# EAGLE board piezo-preamp-tickler_V2-RevC (EAGLE 8.2.1)
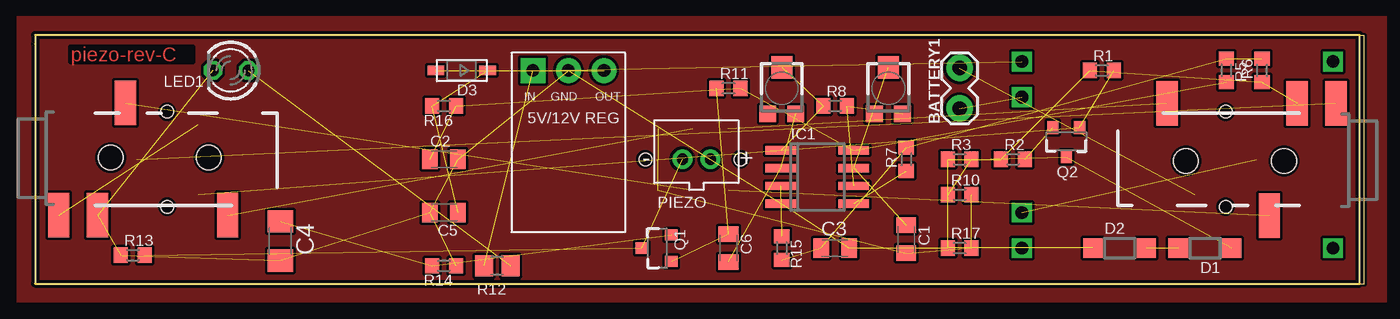
[diagram p0: board, top side]
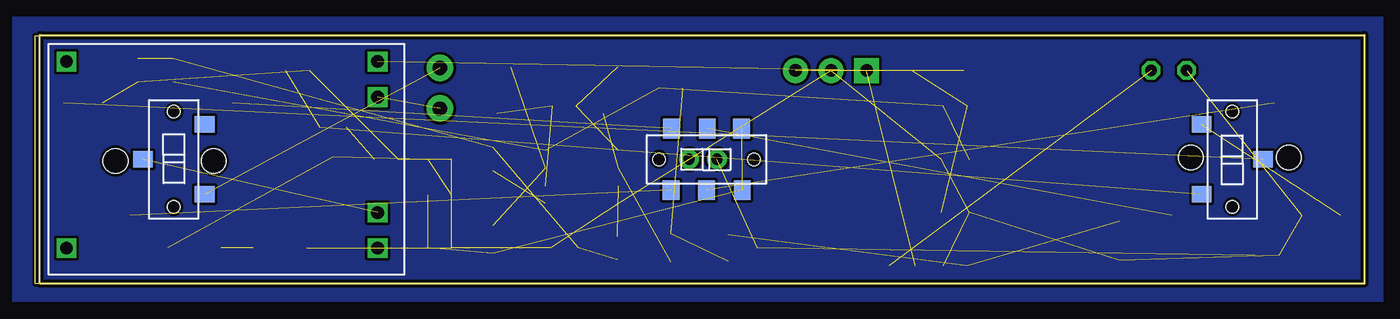
[diagram p1: board, bottom side, seen from below]

Size 94.96 x 17.78 mm. Coordinates in mm from the lower left corner, seen from the top.
Outline: 94.61,0 94.96,0 94.96,17.72 0,17.72 0,17.14
Outline: 0,17.14 0,0 94.61,0
Outline: 94.61,0 94.61,17.78 0,17.78 0,17.14
Copper layers (1*16): Top 0.035mm / dielectric 1.5mm / Bottom 0.035mm
Design rules "default *": minimum track width 6mil, minimum drill 0.35mm, track to track 6mil, track to pad 6mil, pad to pad 6mil, via to via 6mil, smd to smd 6mil, copper to edge 8mil, drill to drill 6mil, minimum pad ring 10mil, minimum via ring 8mil, stop-mask expansion 4mil, vias tented up to drill 0mil, thermal gap 10mil
Net classes: 0 default: width 0.152 mm, clearance 0.2 mm

## Footprints (pad centres in the part's own frame; a part is rotated, then mirrored left to right if it is on the bottom)
1X02_LOCK = drill 1.016 pad 1.88: 1 -0.178,0; 2 2.718,0
C0805K = smd 1.1 x 1.4: 1 -1,0; 2 1,0
C3216 = smd 1.6 x 1.8: 1 -1.4,0; 2 1.4,0
SOD123 = smd 1.4 x 1.4: A 1.9,0; C -1.9,0
SOD-123 = smd 1.2 x 0.7: A 1.85,0; C -1.85,0
SO08 = smd 0.6 x 2.2: 1 -1.905,-2.6; 2 -0.635,-2.6; 3 0.635,-2.6; 4 1.905,-2.6; 5 1.905,2.6; 6 0.635,2.6; 7 -0.635,2.6; 8 -1.905,2.6
POLOLU_5V-12V_STEPUP_U3V12F5-U3V12F12 = drill 0.9 pad 1.778: GND 0,-6.35; VOUT -2.54,-6.35 | drill 0.9 pad 1.778 square: VIN 2.54,-6.35
LED3MM = drill 0.813 octagon: A -1.27,0; K 1.27,0
JST-PH-2-THM = drill 0.8 pad 1.422: 1 1,0; 2 -1,0
SWITCH_SPDT_CL-SB-12B = smd 1.2 x 1.4: P$1 -2.5,-2.2; P$2 0,2.2; P$3 2.5,-2.2 | hole 0.9: -3.4,0; 3.4,0
SOT23-3 = smd 0.8 x 0.9: 1 -0.95,-1; 2 0.95,-1; 3 0,1.1
R0603 = smd 1 x 1.1: 1 -0.85,0; 2 0.85,0
TC33X = smd 1.2 x 1.2: 1 -1,-1.825; 3 1,-1.825 | smd 1.5 x 1.6: 2 0,1.5
R0805 = smd 1.3 x 1.5: 1 -0.95,0; 2 0.95,0
AUDIO-JACK-TRRS-SMD = smd 1.524 x 3.175: EARTH -2.114,-5.271; RING1 2.644,2.759; RING2 0.66,-5.271; TIP 9.948,-5.271 | hole 1.778: 1.6,-1.15; 8.6,-1.15
SWITCH_DPDT_CL-SB-12B = smd 1.2 x 1.4: P$1 -2.5,-2.2; P$2 -0.04,-2.2; P$3 2.5,-2.2; P$4 2.54,2.2; P$5 0,2.2; P$6 -2.54,2.2 | hole 0.9: -3.4,0; 3.4,0
TP4056-LITHIUM-PROTECTED-MODULE = drill 0.9 square: B+ 10.795,4.445; B- 10.795,-3.81; IN+ -11.43,6.985; IN- -11.43,-6.35; OUT+ 10.795,6.985; OUT- 10.795,-6.35

## Placement (x,y rotation side)
BATTERY1  [1X02_LOCK]  66.04,12.7 90 top
C1  10uF  [C0805K]  62.23,3.17 270 top
C2  0.1uF  [C0805K]  29.21,8.89 0 top
C3  10uF  [C0805K]  57.15,2.54 0 top
C4  150uF  [C3216]  17.53,3.05 270 top
C5  10uF  [C0805K]  29.21,5.08 180 top
C6  3.3uF  [C0805K]  49.53,2.54 270 top
D1  [SOD123]  83.57,2.54 180 top
D2  [SOD123]  77.47,2.54 0 top
D3  1N4148  [SOD-123]  30.48,15.24 180 top
IC1  OPA2134UA  [SO08]  55.88,7.62 270 top
J_REG_12V  POLOLU_VOLTAGE_REGULATORS_3PIN  [POLOLU_5V-12V_STEPUP_U3V12F5-U3V12F12]  38.1,8.89 180 top
LED1  [LED3MM]  13.97,15.24 180 top
PIEZO  [JST-PH-2-THM]  47.24,8.89 0 top
POWER  SPDT  [SWITCH_SPDT_CL-SB-12B]  85.04,8.89 90 bottom
Q1  J201SOT-23  [SOT23-3]  44.45,2.54 90 top
Q2  J201SOT-23  [SOT23-3]  73.66,10.16 180 top
R1  2.2K  [R0603]  76.2,15.24 0 top
R2  1.2K  [R0603]  69.85,8.89 0 top
R3  1M  [R0603]  66.04,8.89 0 top
R4  20K  [TC33X]  53.34,13.97 0 top
R5  100K  [R0603]  85.09,15.24 270 top
R6  150K  [R0603]  87.63,15.24 90 top
R7  1K  [R0603]  62.23,8.89 90 top
R8  1K  [R0603]  57.15,12.7 0 top
R9  20K  [TC33X]  60.96,13.97 0 top
R10  1K  [R0603]  66.04,6.35 0 top
R11  10K  [R0603]  49.53,13.97 0 top
R12  390  [R0805]  33.02,1.27 180 top
R13  10M  [R0603]  6.99,2.03 0 top
R14  1.2K  [R0603]  29.21,1.27 180 top
R15  1K  [R0603]  53.34,2.54 270 top
R16  10  [R0603]  29.21,12.7 180 top
R17  10K  [R0603]  66.04,2.54 0 top
SW2-SPST  INPUT-select  [SWITCH_SPDT_CL-SB-12B]  9.45,8.89 270 bottom
TO-HEADSET  AUDIO-JACK3LGPADS  [AUDIO-JACK-TRRS-SMD]  3.81,10.16 0 top
TO-PHONE  AUDIO-JACK3LGPADS  [AUDIO-JACK-TRRS-SMD]  90.81,7.62 180 top
U$2  SWITCH_DPDT  [SWITCH_DPDT_CL-SB-12B]  46.99,8.89 180 bottom
USB-LIPO-CHARGER  TP4056-MODULE  [TP4056-LITHIUM-PROTECTED-MODULE]  81.28,8.89 0 bottom

## Library data of the parts
BATTERY1 = SparkFun-Connectors
C1-C6 PIEZO R4 R9 = adafruit
D1 D2 = diode
D3 = adafruit; DIGIKEY: 1N4148WTPMSCT-ND
IC1 = linear
J_REG_12V POWER Q1 Q2 R1-R3 R5-R8 R10-R17 SW2-SPST U$2 USB-LIPO-CHARGER = CMU-ArtFab
LED1 = led
TO-HEADSET TO-PHONE = Daniel

## Nets
+12V: D3.A J_REG_12V.VOUT
GND: C2.2 C3.2 C4.2 C5.2 D2.C IC1.4 J_REG_12V.GND LED1.K PIEZO.1 R1.1 R2.1 R3.1 R6.1 R13.1 R14.1 R17.1 TO-HEADSET.RING2 TO-PHONE.RING2 USB-LIPO-CHARGER.OUT-
IN+: USB-LIPO-CHARGER.IN+
IN-: USB-LIPO-CHARGER.IN-
N$1: D1.A D2.A
N$2: PIEZO.2 Q1.3 R13.2
N$3: Q2.2 R2.2
N$5: IC1.5 R7.1
N$6: C1.1 IC1.7 R9.2
N$7: IC1.6 R8.2 R9.3
N$9: C6.1 Q1.1 R11.1
N$10: D1.C Q2.3 R3.2 R10.1
N$11: C1.2 R10.2 R17.2 U$2.P$1 U$2.P$6
N$12: SW2-SPST.P$1 TO-HEADSET.EARTH
N$13: TO-HEADSET.TIP U$2.P$2
N$14: C4.1 Q1.2 R14.2
N$15: TO-HEADSET.RING1 U$2.P$5
N$16: C5.1 D3.C R16.2
N$17: SW2-SPST.P$2 TO-PHONE.EARTH
N$18: LED1.A R12.1
N$19: BATTERY1.1 USB-LIPO-CHARGER.B+
N$20: POWER.P$2 USB-LIPO-CHARGER.B-
N$21: BATTERY1.2 POWER.P$1
N$22: IC1.3 R15.1
N$23: C3.1 R5.1 R6.2 R7.2 R15.2
N$24: IC1.1 R4.2 R8.1
N$25: C2.1 IC1.8 R5.2 R11.2 R16.1
N$26: TO-PHONE.RING1 U$2.P$4
N$27: TO-PHONE.TIP U$2.P$3
N$28: C6.2 IC1.2 R4.3
SELECT: Q2.1 R1.2 SW2-SPST.P$3
VBAT: J_REG_12V.VIN R12.2 USB-LIPO-CHARGER.OUT+

## Tracks (layer width: path | path; a pad name or v marks a point on that pad's centre or on a via)
+12V  (1 unrouted)
GND  (18 unrouted)
N$1  (1 unrouted)
N$2  (2 unrouted)
N$3  (1 unrouted)
N$4
  pour Top: -1.27,19.05 -1.27,-1.27 96.52,-1.27 96.52,19.05
N$5  (1 unrouted)
N$6  (2 unrouted)
N$7  (2 unrouted)
N$8
  pour Bottom: -1.27,19.05 -1.27,-1.27 96.52,-1.27 96.52,19.05
N$9  (2 unrouted)
N$10  (3 unrouted)
N$11  (4 unrouted)
N$12  (1 unrouted)
N$13  (1 unrouted)
N$14  (2 unrouted)
N$15  (1 unrouted)
N$16  (2 unrouted)
N$17  (1 unrouted)
N$18  (1 unrouted)
N$19  (1 unrouted)
N$20  (1 unrouted)
N$21  (1 unrouted)
N$22  (1 unrouted)
N$23  (4 unrouted)
N$24  (2 unrouted)
N$25  (4 unrouted)
N$26  (1 unrouted)
N$27  (1 unrouted)
N$28  (2 unrouted)
SELECT  (2 unrouted)
VBAT  (2 unrouted)

## Text on the board
Top: piezo-rev-C